# EAGLE board DAC&LP-filter (EAGLE 9.6.0)
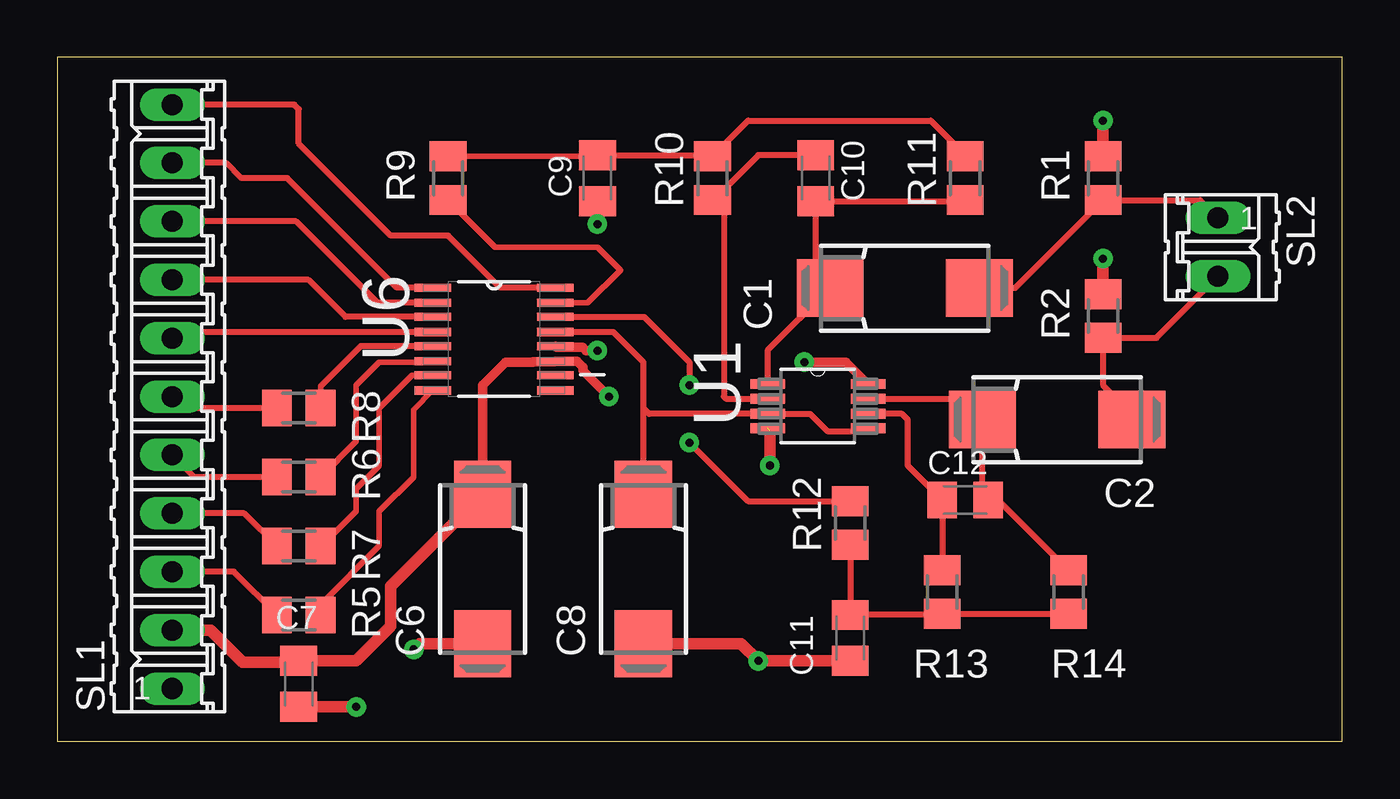
[diagram p0: board, top side]
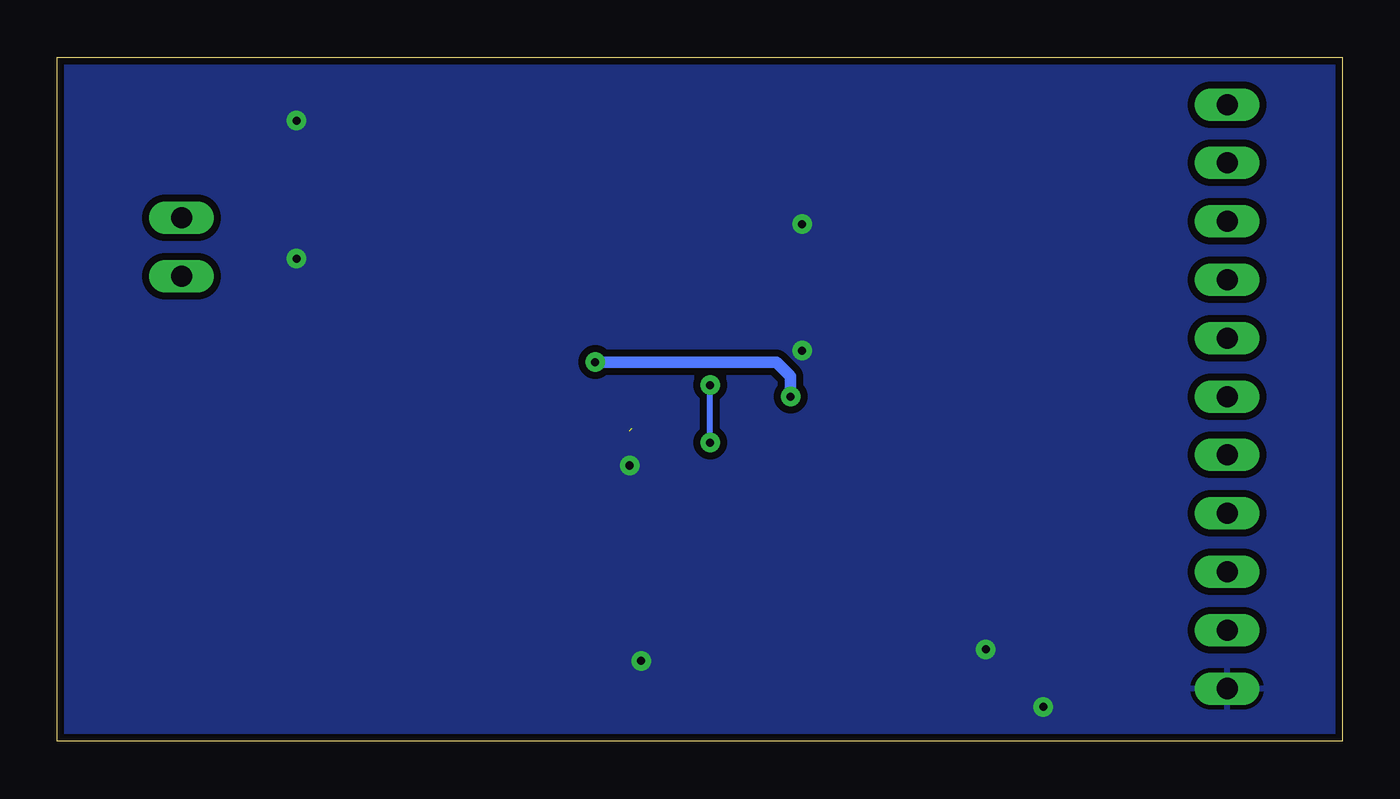
[diagram p1: board, bottom side, seen from below]

Size 55.9 x 29.75 mm. Coordinates in mm from the lower left corner, seen from the top.
Outline: 0,0 55.9,0 55.9,29.75 0,29.75 0,0
Copper layers (1*16): Top 0.018mm / dielectric 1.55mm / Bottom 0.018mm
Design rules "Eurocircuits_GT_panel": minimum track width 0.25mm, minimum drill 0.35mm, track to track 0.2mm, track to pad 0.2mm, pad to pad 0.2mm, via to via 0.2mm, smd to smd 0mil, copper to edge 0.25mm, drill to drill 0.35mm, minimum pad ring 0.25mm, minimum via ring 0.25mm, stop-mask expansion 0mil, vias tented up to drill 0.45mm, thermal gap 0.2mm

## Footprints (pad centres in the part's own frame; a part is rotated, then mirrored left to right if it is on the bottom)
085CS_1AR = smd 2.9 x 2.5: + 3.25,0; - -3.25,0
C0805K = smd 1.3 x 1.6: 1 -1,0; 2 1,0
M0805 = smd 1.3 x 1.6: 1 -0.95,0; 2 0.95,0
11P = drill 0.914 long: 1 -12.7,0; 2 -10.16,0; 3 -7.62,0; 4 -5.08,0; 5 -2.54,0; 6 0,0; 7 2.54,0; 8 5.08,0; 9 7.62,0; 10 10.16,0; 11 12.7,0
02P = drill 0.914 long: 1 -1.27,0; 2 1.27,0
SOP65P490X110-8N = smd 1.499 x 0.432: 1 -2.184,0.965; 2 -2.184,0.33; 3 -2.184,-0.33; 4 -2.184,-0.965; 5 2.184,-0.965; 6 2.184,-0.33; 7 2.184,0.33; 8 2.184,0.965
SOP63P600X175-16N = smd 1.6 x 0.356: 1 -2.667,2.235; 2 -2.667,1.575; 3 -2.667,0.965; 4 -2.667,0.305; 5 -2.667,-0.305; 6 -2.667,-0.965; 7 -2.667,-1.575; 8 -2.667,-2.235; 9 2.667,-2.235; 10 2.667,-1.575; 11 2.667,-0.965; 12 2.667,-0.305; 13 2.667,0.305; 14 2.667,0.965; 15 2.667,1.575; 16 2.667,2.235

## Placement (x,y rotation side)
C1  10µ  [085CS_1AR]  36.87,19.72 180 top
C2  10µ  [085CS_1AR]  43.5,14 180 top
C6  10µ  [085CS_1AR]  18.5,7.5 90 top
C7  0.1µ  [C0805K]  10.5,2.5 270 top
C8  10µ  [085CS_1AR]  25.5,7.5 90 top
C9  2.7n  [C0805K]  23.5,24.5 270 top
C10  330p  [C0805K]  33,24.5 90 top
C11  2.7n  [C0805K]  34.5,4.5 270 top
C12  330p  [C0805K]  39.5,10.5 180 top
R1  2k  [M0805]  45.5,24.5 270 top
R2  2k  [M0805]  45.5,18.5 270 top
R5  100  [M0805]  10.5,5.5 180 top
R6  100  [M0805]  10.5,11.5 180 top
R7  100  [M0805]  10.5,8.5 180 top
R8  100  [M0805]  10.5,14.5 180 top
R9  3.9k  [M0805]  17,24.5 270 top
R10  12k  [M0805]  28.5,24.5 90 top
R11  3.9k  [M0805]  39.5,24.5 90 top
R12  3.9k  [M0805]  34.5,9.5 90 top
R13  12k  [M0805]  38.5,6.5 270 top
R14  3.9k  [M0805]  44,6.5 270 top
SL1  [11P]  5,15 90 top
SL2  [02P]  50.5,21.5 270 top
U1  AD8646ARMZ  [SOP65P490X110-8N]  33.09,14.58 0 top
U6  PCM1780DBQ  [SOP63P600X175-16N]  19,17.5 0 top

## Library data of the parts
C1 C2 C6-C12 = rcl; SPICEPREFIX: C
R1 R2 R5-R14 = rcl; SPICEPREFIX: R
SL1 SL2 = con-amp-quick; OC_FARNELL: unknown; OC_NEWARK: unknown
U1 = AD8646ARMZ; AVAILABILITY: Good; DESCRIPTION: General Purpose Amplifier 2 Circuit Rail-to-Rail 8-MSOP; MF: Analog Devices; MP: AD8646ARMZ; PACKAGE: MSOP-8 Analog Devices; PRICE: None; PURCHASE-URL: https://pricing.snapeda.com/search/part/AD8646ARMZ/?ref=eda
U6 = PCM1780DBQ; AVAILABILITY: Unavailable; DESCRIPTION: 106dB SNR Stereo DAC (S/W Control) 16-SSOP -20 to 85; MF: Texas Instruments; MP: PCM1780DBQ; PACKAGE: SSOP-16 Texas Instruments; PRICE: None; PURCHASE-URL: https://pricing.snapeda.com/search/part/PCM1780DBQ/?ref=eda

## Nets
+5V: C6.+ C7.1 SL1.2 U1.8 U6.11
AGND: C6.- C7.2 C8.- C9.2 C11.2 R1.1 R2.1 SL1.1 U1.4 U6.12
BCK: R7.2 SL1.4
DATA: R6.2 SL1.5
LRCK: R5.2 SL1.3
MC: SL1.8 U6.3
MD: SL1.7 U6.4
MS: SL1.9 U6.2
N$1: C1.- R1.2 SL2.1
N$2: C2.+ C12.1 R14.1 U1.7
N$3: C2.- R2.2 SL2.2
N$20: R5.1 U6.8
N$21: R6.1 U6.6
N$23: R7.1 U6.7
N$24: R8.1 U6.5
N$25: C8.+ U1.3 U1.5 U6.13
N$26: R9.2 U6.15
N$27: C9.1 R9.1 R10.2 R11.2
N$28: C1.+ C10.1 R11.1 U1.1
N$29: C10.2 R10.1 U1.2
N$30: R12.2 U6.14
N$31: C11.1 R12.1 R13.2 R14.2
N$33: C12.2 R13.1 U1.6
SCK: R8.2 SL1.6
ZEROL/NA: SL1.10 U6.1
ZEROR/ZEROA: SL1.11 U6.16

## Tracks (layer width: path | path; a pad name or v marks a point on that pad's centre or on a via)
+5V  (via drill 0.35)
  Top 0.406: v24,15 22.87,16.13 22.87,16.27 22.61,16.54 U6.11 21.64,16.51 20.7,16.51 20.69,16.5 19.5,16.5 18.5,15.5 C6.+ | v32.5,16.5 34.32,16.5 U1.8
  Top 0.508: SL1.2 6.66,4.84 8.06,3.44 10.44,3.44 C7.1 13,3.5 14.5,5 14.5,6.75 C6.+
  Bottom 0.508: v24,15 24,15.89 24.61,16.5 v32.5,16.5
AGND  (via drill 0.35)  (1 unrouted)
  Top 0.406: v23.5,17 23,17 22.86,17.14 21.72,17.14 U6.12
  Top 0.508: v15.5,4 15.75,4.25 C6.- | v13,1.5 C7.2 | C8.- 29.75,4.25 v30.5,3.5 C11.2 | R2.1 v45.5,21 | R1.1 v45.5,27 | v23.5,22.5 C9.2 | 31,13.52 v31,12
  pour Bottom (isolate 0.305): 0,29.5 0,0 56,0 56,29.5
BCK
  Top 0.254: R7.2 8.13,9.92 SL1.4
DATA
  Top 0.254: R6.2 5.96,11.5 SL1.5
LRCK
  Top 0.254: R5.2 7.67,7.38 SL1.3
MC
  Top 0.254: U6.3 12.54,18.46 10.92,20.08 SL1.8
MD
  Top 0.254: U6.4 5.26,17.8 SL1.7
MS
  Top 0.254: U6.2 13.93,19.07 10.38,22.62 SL1.9
N$1
  Top 0.254: C1.- 41.67,19.72 R1.2 49.72,23.55 SL2.1
N$2
  Top 0.254: U1.7 39.34,14.91 C2.+ 40.25,10.75 C12.1 40.95,10.5 R14.1
N$3
  Top 0.254: SL2.2 47.82,17.55 R2.2 45.5,15.5 46.75,14.25 C2.-
N$20
  Top 0.25: U6.8 15.5,14.43 15.5,11.5 14,10 14,8.5 11.45,5.95 R5.1
N$21
  Top 0.25: U6.6 16.3,16.5 14,16.5 13,15.5 13,13.05 R6.1
N$23
  Top 0.25: U6.7 15.43,15.93 14,14.5 14,12 13,11 13,10 11.5,8.5 R7.1
N$24
  Top 0.25: 13,17 11.45,15.45 R8.1
  Top 0.254: U6.5 13.2,17.2 13,17
N$25
  Top 0.254: C8.+ 25.5,14.5 | 25.5,14.5 25.5,16.5 24.2,17.8 U6.13 | 25.5,14.5 25.75,14.25 U1.3 32.75,14.25 33.5,13.5 35.16,13.5 U1.5
N$26
  Top 0.25: R9.2 19.05,21.5 23.5,21.5 24.5,20.5 23.07,19.07 U6.15
N$27
  Top 0.25: R9.1 23.45,25.45 C9.1
  Top 0.254: C9.1 28.45,25.5 R10.2 30.05,27 38,27 39.5,25.5 R11.2
N$28
  Top 0.254: R11.1 39.45,23.5 C10.1 33,20.34 C1.+ 30.91,17.01 U1.1
N$29
  Top 0.254: 28.52,23.52 29,23.05 29,15 29.09,14.91 U1.2 | 28.52,23.52 R10.1 | 28.52,23.52 30.5,25.5 C10.2
N$30  (via drill 0.35)
  Top 0.254: U6.14 25.54,18.46 27.5,16.5 v27.5,15.5 | v27.5,13 30.05,10.45 R12.2
  Bottom 0.254: v27.5,13 v27.5,15.5
N$31
  Top 0.254: R12.1 C11.1 38.45,5.5 R13.2 R14.2
N$33
  Top 0.254: R13.1 C12.2 37,12 37,14 36.75,14.25 U1.6
SCK
  Top 0.254: R8.2 5.5,14.5 SL1.6
ZEROL/NA
  Top 0.254: U6.1 14.77,19.73 10,24.5 8,24.5 7.34,25.16 SL1.10
ZEROR/ZEROA
  Top 0.254: U6.16 19.27,19.73 17,22 14.5,22 10.5,26 10.5,27.5 10.3,27.7 SL1.11